# Altium PCB concentrator_pcb.PcbDoc
Units mm, origin at the board's own origin, x right, y up, seen from the top; angles counter-clockwise.
Board outline 85 x 56 mm, 4 copper layers (Top Layer, Int1 (GND), Int2 (PWR), Bottom Layer), stack 1.369 mm thick; 6 components, 0 nets, 202 pads, 0 vias.
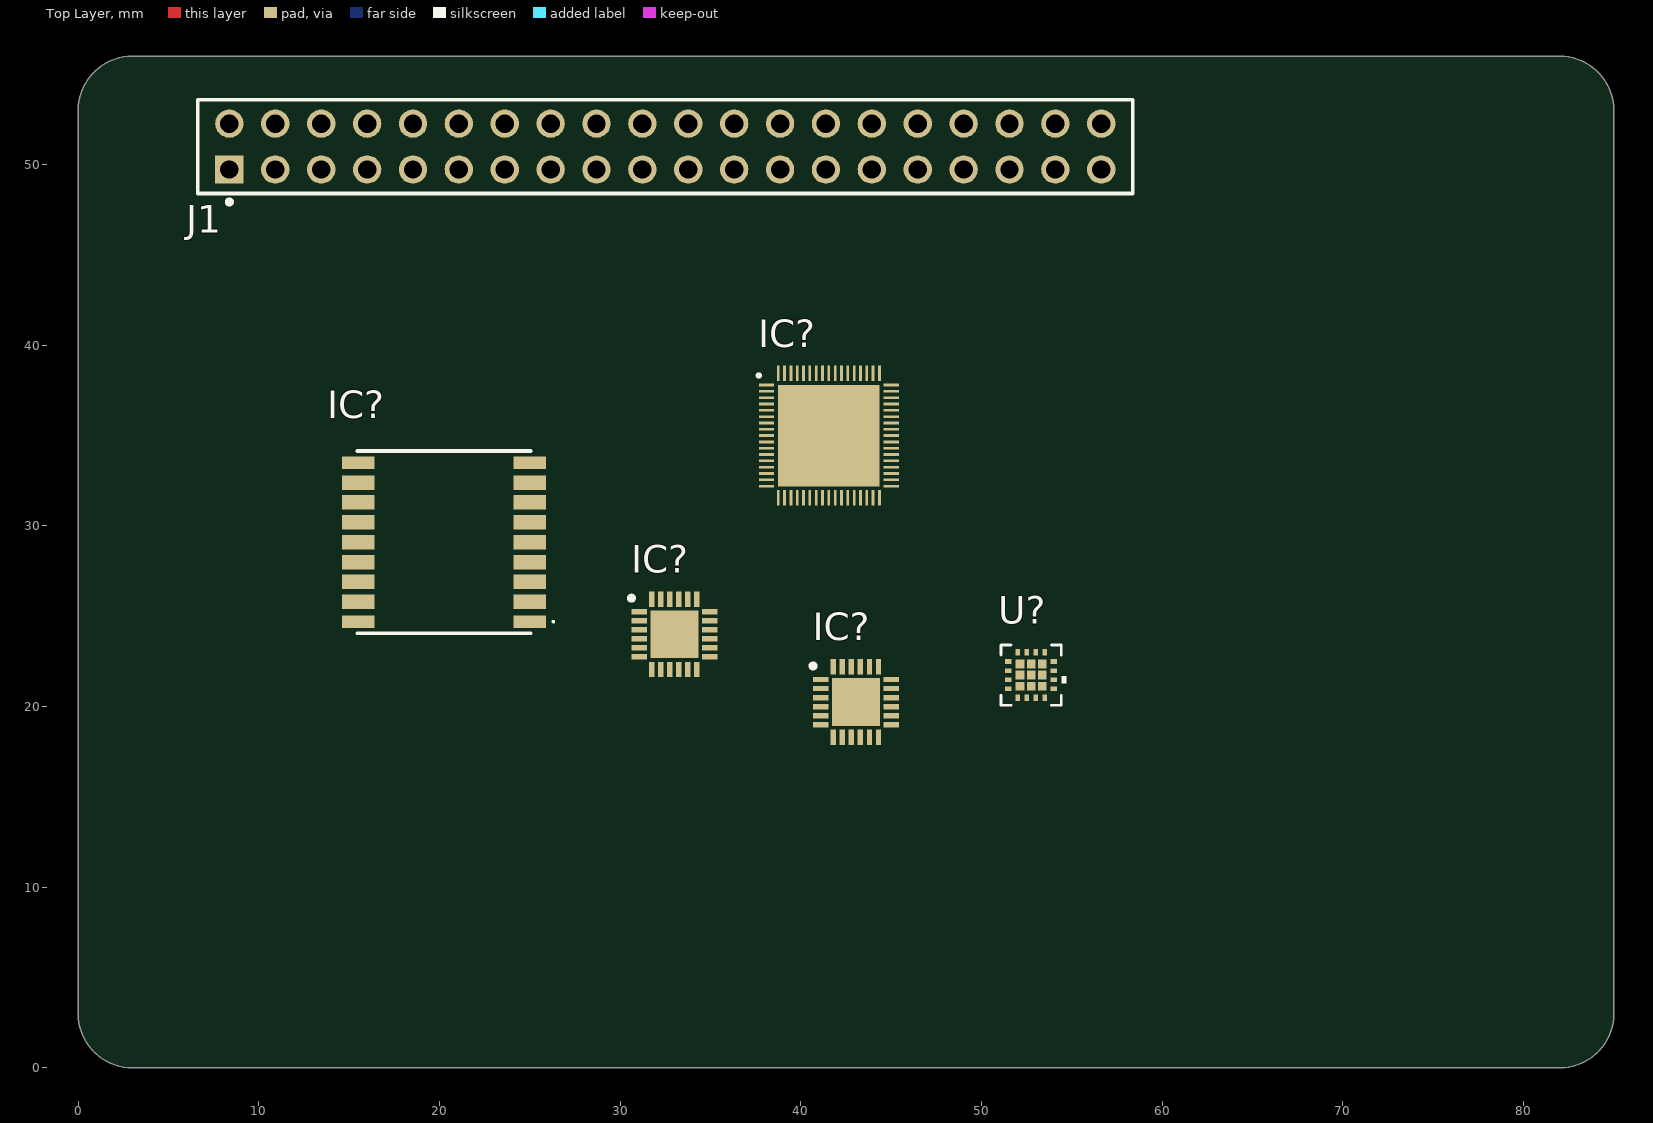
[diagram p0: Top Layer view]
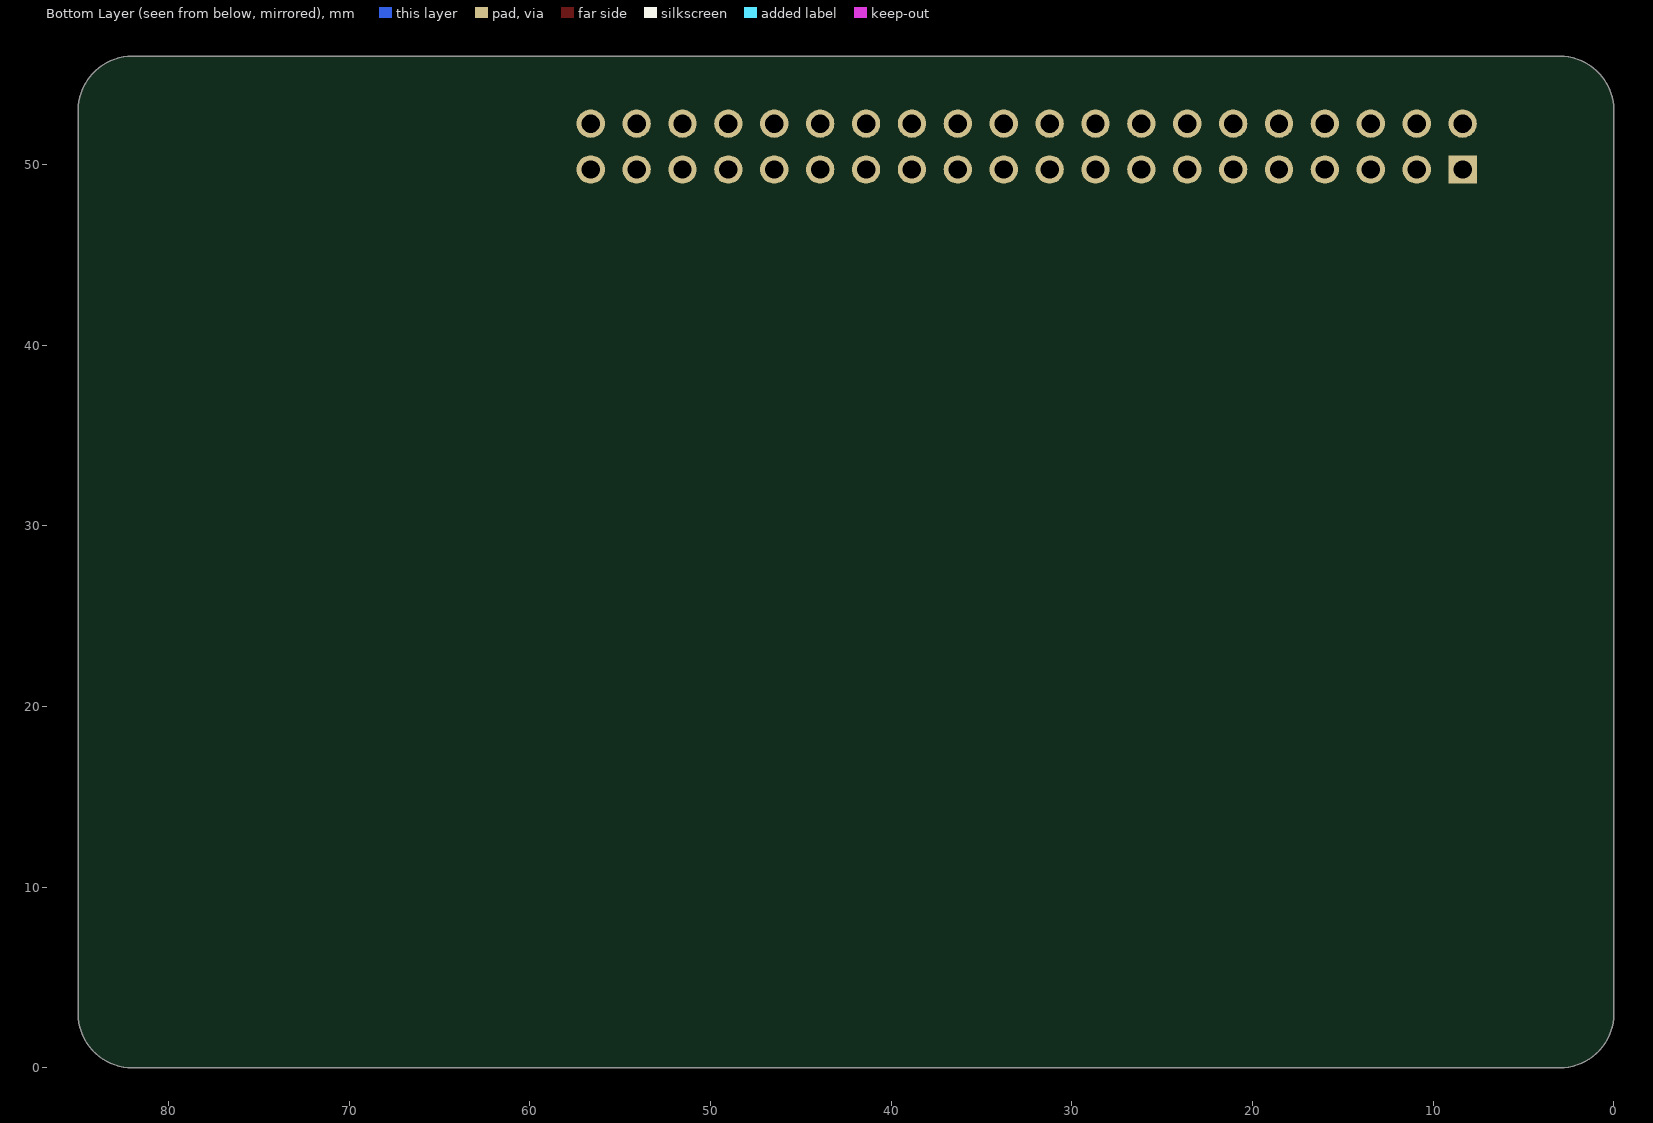
[diagram p1: Bottom Layer view, seen from below]
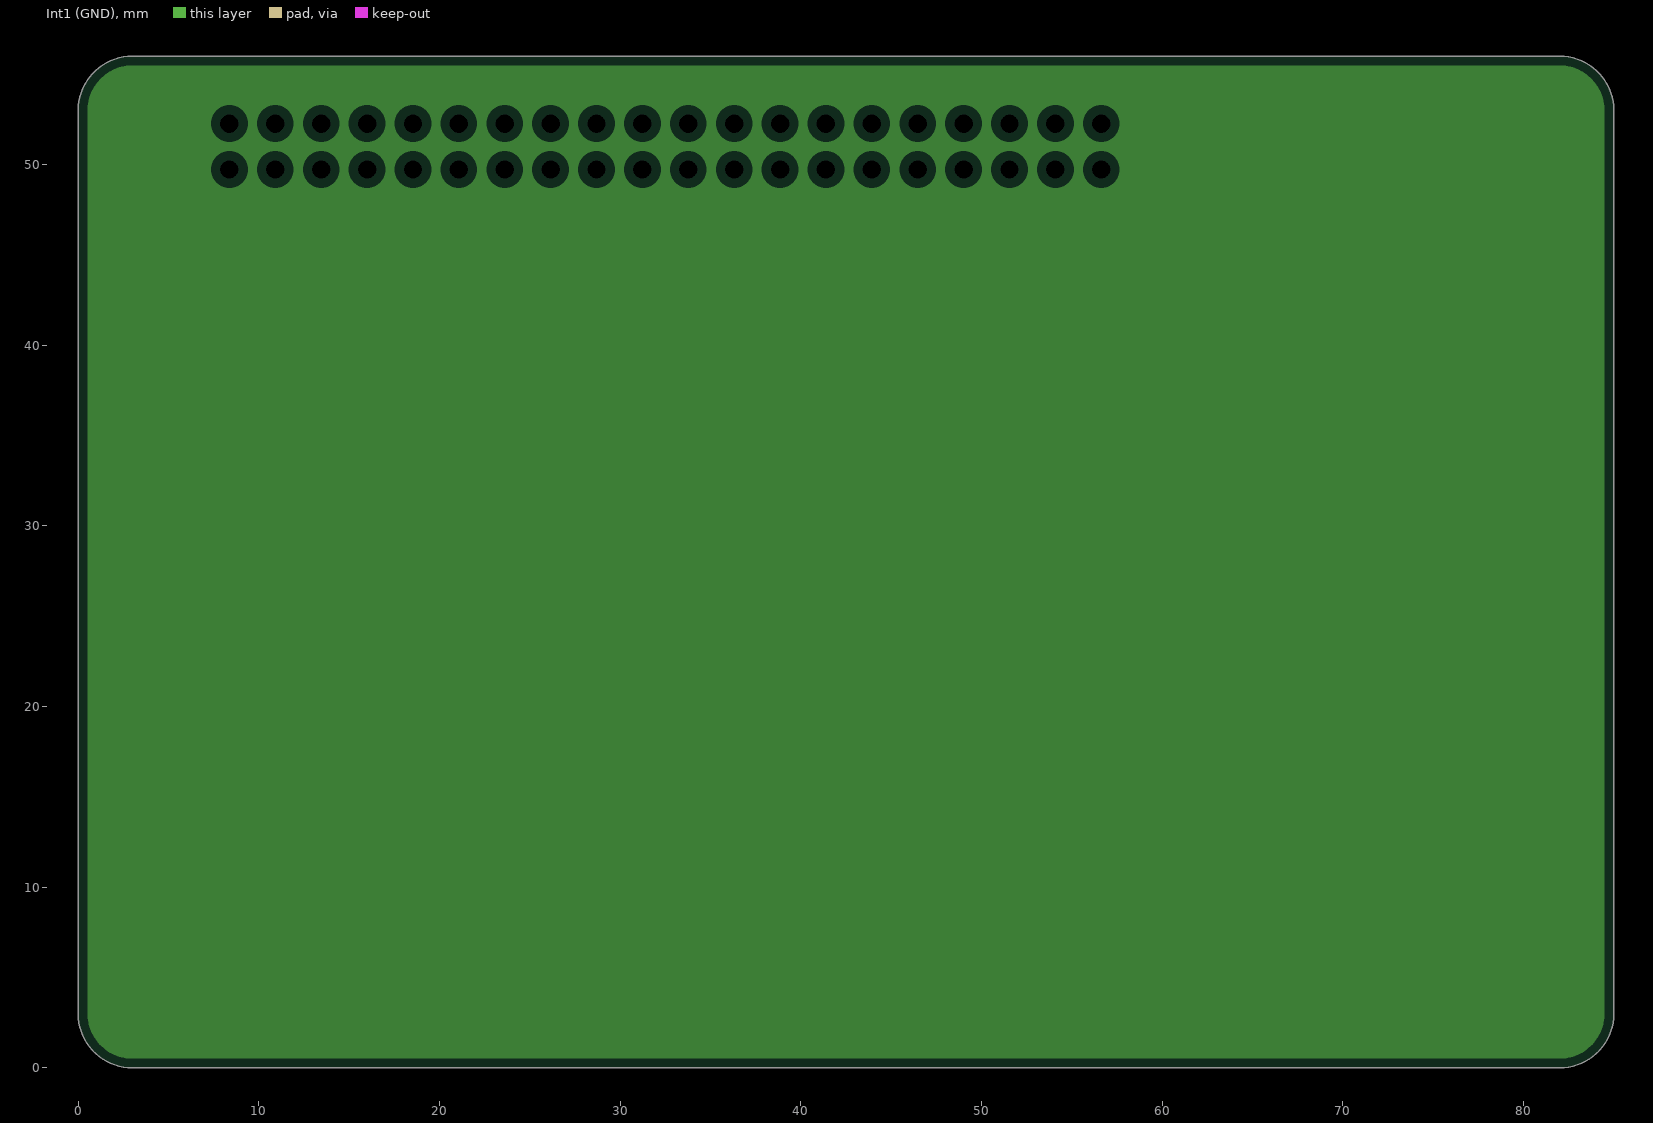
[diagram p2: Int1 (GND), clearances drawn from the general rule]
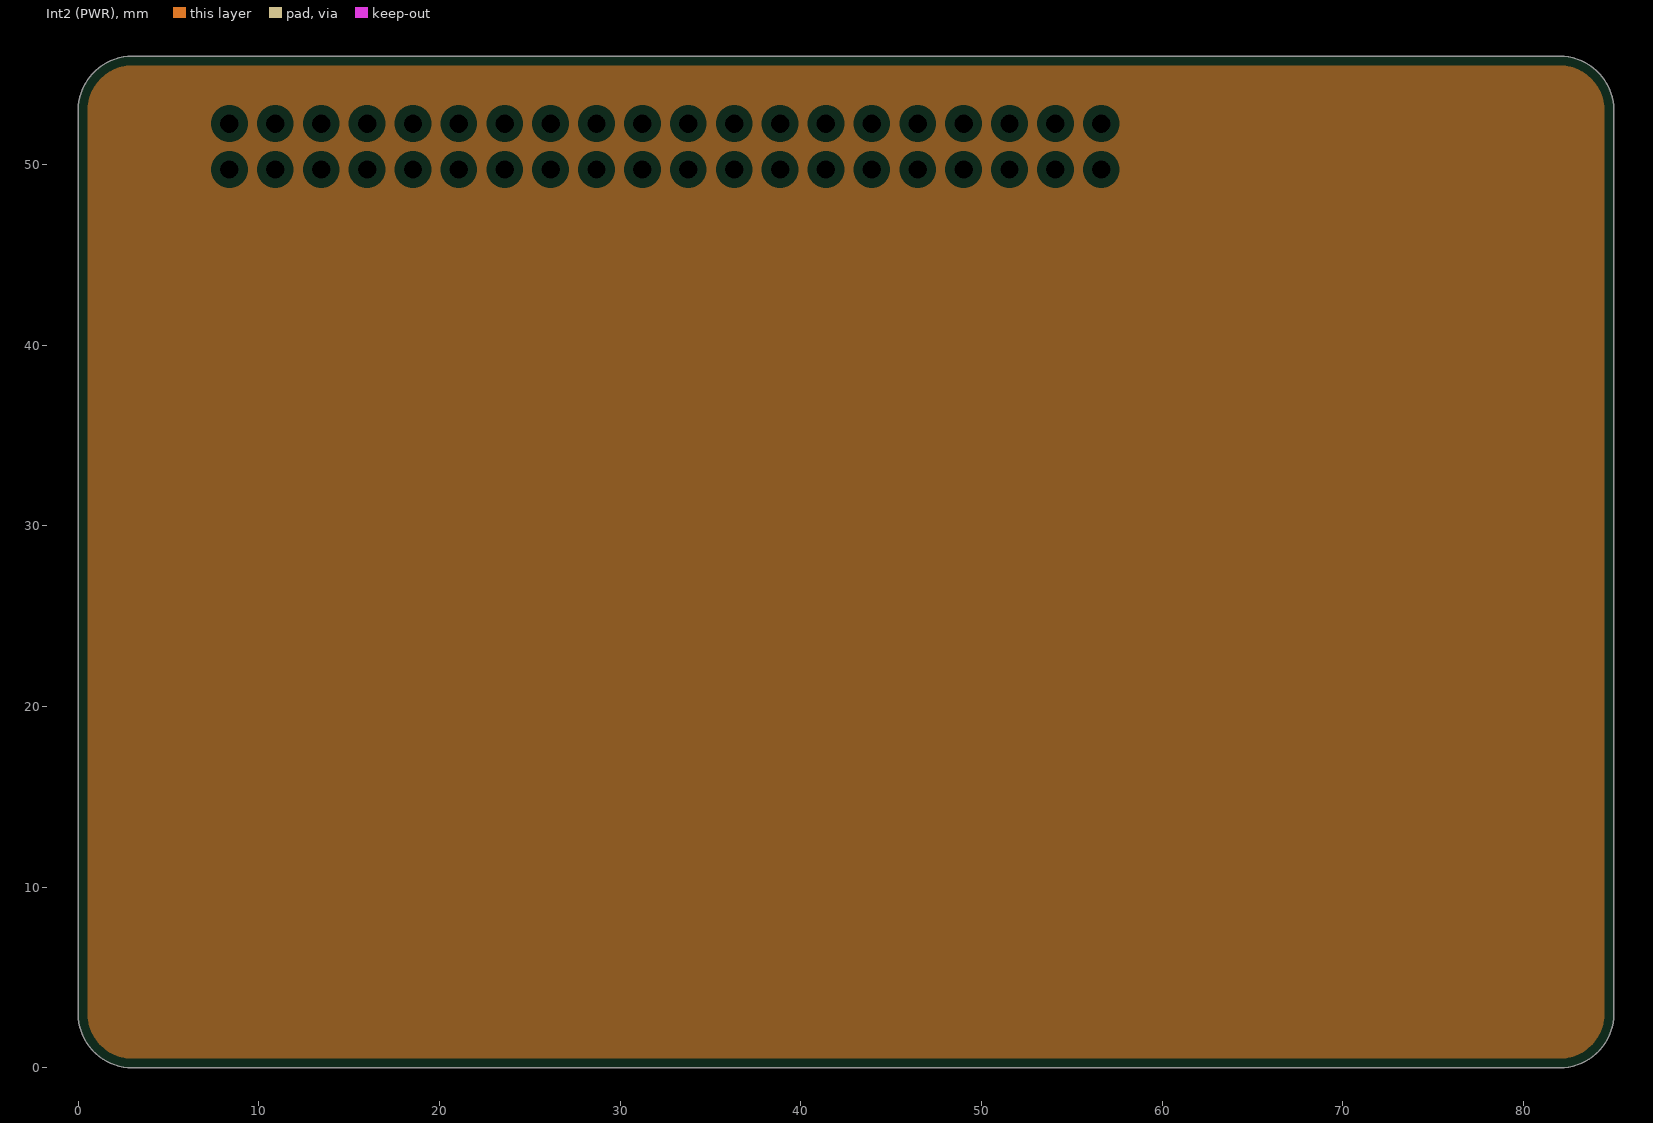
[diagram p3: Int2 (PWR), clearances drawn from the general rule]

## Layer stack, top to bottom
Top Solder: solder mask 0.0254, SM-001, Dk 4
Top Layer: signal copper 0.035
Dielectric 1: prepreg 0.1295, PP-017, Dk 4.3
Dielectric 2: prepreg 0.1295, PP-017, Dk 4.3
Int1 (GND): plane copper 0.035
Dielectric 3: core 0.7112, Core-039, Dk 4.8
Int2 (PWR): plane copper 0.035
Dielectric 4: prepreg 0.1295, PP-017, Dk 4.3
Dielectric 5: prepreg 0.1295, PP-017, Dk 4.3
Bottom Layer: signal copper 0.035
Bottom Solder: solder mask 0.0254, SM-001, Dk 4

## Board outline
0,3 0,53 cw(c3,53) 3,56 82,56 cw(c82,53) 85,53 85,3 cw(c82,3) 82,0 3,0 cw(c3,3)

## Design rules (kind name [scope] priority, off if disabled: settings)
Clearance [All] p1: gap=0.254 ignorepadtopadclearanceinfootprint=FALSE except(0: Arc-Hole Track-Hole SMDPad-Hole THPad-Hole Via-Hole Fill-Hole Poly-Hole Region-Hole Text-Hole)
PlaneClearance [All] p1: clearance=0.508
PlaneConnect [All] p1: planeconnectstyle=Relief reliefexpansion=0.508 reliefentries=4 reliefconductorwidth=0.254 reliefairgap=0.254
PolygonConnect [All] p1: connectstyle=Relief reliefconductorwidth=0.254 reliefentries=4 polygonreliefangle="90 Angle" airgapwidth=0.254
RoutingVias [All] p1: holewidth=0.711 width=1.27 viastyle="Through Hole" minholewidth=0.711 minwidth=1.27 maxholewidth=0.711 maxwidth=1.27
SolderMaskExpansion [All] p1: expansion=0.102 istentingtop=FALSE
Width [All] p1: maxlimit=0.254 minlimit=0.254 preferedwidth=0.254
28 further rules are at their usual default settings.

## Classes and differential pairs
component class sensors: IC?
component class lora-core: IC? U?
component class interfaces: J1

## Components (designator, comment, footprint, x,y, rotation, side; value= is the part's Value field where it differs from the comment)
IC? "MAX-M10S-00B" MAXM10S00B 20.25,29.1 r0 top
IC? "SX1250IMLTRT" QFN50P400X400X100-25N-D 33,24 r0 top
IC? "SX1250IMLTRT" QFN50P400X400X100-25N-D 43.05,20.25 r0 top
IC? "SX1302IMLTRT" QFN35P700X700X80-69N-D 41.55,35 r0 top
J1 "M20-6102045" FP-M20-6102045-MFG 32.5,51 r0 top
U? "SKY66420-11" MCM16_3X3X0P75_SKY 52.75,21.743 r0 top

## Footprints (in the part's own frame and the unit in brackets; to place one, negate y for a bottom-side part, rotate by r counter-clockwise, add the part's x,y. Pads: shape width x height; smd on the part's side, far side on the other; paste and mask are expansions set on the pad)
FP-M20-6102045-MFG [mm]
  rect 1.57x1.57 hole 1.02 paste-1000 mask+0: 1(-24.13,-1.27)
  round 1.57 hole 1.02 paste-1000 mask+0: 2(-24.13,1.27) 3(-21.59,-1.27) 4(-21.59,1.27) 5(-19.05,-1.27) 6(-19.05,1.27) 7(-16.51,-1.27) 8(-16.51,1.27) 9(-13.97,-1.27) 10(-13.97,1.27) 11(-11.43,-1.27) 12(-11.43,1.27) 13(-8.89,-1.27) 14(-8.89,1.27) 15(-6.35,-1.27) 16(-6.35,1.27) 17(-3.81,-1.27) 18(-3.81,1.27) 19(-1.27,-1.27) 20(-1.27,1.27) 21(1.27,-1.27) 22(1.27,1.27) 23(3.81,-1.27) 24(3.81,1.27) 25(6.35,-1.27) 26(6.35,1.27) 27(8.89,-1.27) 28(8.89,1.27) 29(11.43,-1.27) 30(11.43,1.27) 31(13.97,-1.27) 32(13.97,1.27) 33(16.51,-1.27) 34(16.51,1.27) 35(19.05,-1.27) 36(19.05,1.27) 37(21.59,-1.27) 38(21.59,1.27) 39(24.13,-1.27) 40(24.13,1.27)
  silkscreen extent -25.88,-3.19 25.88,2.6, body extent -25.98,-2.7 25.98,2.7, height 0.25
MAXM10S00B [mm]
  rect 1.8x0.7 smd: 1(4.75,-4.4) 9(4.75,4.4) 10(-4.75,4.4) 18(-4.75,-4.4)
  rect 1.8x0.8 smd: 2(4.75,-3.3) 3(4.75,-2.2) 4(4.75,-1.1) 5(4.75,0) 6(4.75,1.1) 7(4.75,2.2) 8(4.75,3.3) 11(-4.75,3.3) 12(-4.75,2.2) 13(-4.75,1.1) 14(-4.75,0) 15(-4.75,-1.1) 16(-4.75,-2.2) 17(-4.75,-3.3)
  silkscreen extent -4.8,-5.05 6.1,5.05, body extent -4.85,-5.05 4.85,5.05, height 2.8
MCM16_3X3X0P75_SKY [mil]
  rect 14x10 smd paste+0 mask+0: 1(-49.5,29.53) 2(-49.5,9.84) 3(-49.5,-9.84) 4(-49.5,-29.53) 9(49.5,-29.53) 10(49.5,-9.84) 11(49.5,9.84) 12(49.5,29.53)
  rect 10x14 smd paste+0 mask+0: 5(-29.53,-49.5) 6(-9.84,-49.5) 7(9.84,-49.5) 8(29.53,-49.5) 13(29.53,49.5) 14(9.84,49.5) 15(-9.84,49.5) 16(-29.53,49.5)
  rect 19x19 smd paste+0 mask+0: 17(-24.21,24.21) 18(0,24.21) 19(24.21,24.21) 20(-24.21,0) 21(0,0) 22(24.21,0) 23(-24.21,-24.21) 24(0,-24.21) 25(24.21,-24.21)
  silkscreen extent -65,-66 76,66, body extent -59,-59 59,59, height 31
QFN35P700X700X80-69N-D [mm]
  rect 0.85x0.15 smd: 1(-3.45,2.8) 2(-3.45,2.45) 3(-3.45,2.1) 4(-3.45,1.75) 5(-3.45,1.4) 6(-3.45,1.05) 7(-3.45,0.7) 8(-3.45,0.35) 9(-3.45,0) 10(-3.45,-0.35) 11(-3.45,-0.7) 12(-3.45,-1.05) 13(-3.45,-1.4) 14(-3.45,-1.75) 15(-3.45,-2.1) 16(-3.45,-2.45) 17(-3.45,-2.8) 35(3.45,-2.8) 36(3.45,-2.45) 37(3.45,-2.1) 38(3.45,-1.75) 39(3.45,-1.4) 40(3.45,-1.05) 41(3.45,-0.7) 42(3.45,-0.35) 43(3.45,0) 44(3.45,0.35) 45(3.45,0.7) 46(3.45,1.05) 47(3.45,1.4) 48(3.45,1.75) 49(3.45,2.1) 50(3.45,2.45) 51(3.45,2.8)
  rect 0.15x0.85 smd: 18(-2.8,-3.45) 19(-2.45,-3.45) 20(-2.1,-3.45) 21(-1.75,-3.45) 22(-1.4,-3.45) 23(-1.05,-3.45) 24(-0.7,-3.45) 25(-0.35,-3.45) 26(0,-3.45) 27(0.35,-3.45) 28(0.7,-3.45) 29(1.05,-3.45) 30(1.4,-3.45) 31(1.75,-3.45) 32(2.1,-3.45) 33(2.45,-3.45) 34(2.8,-3.45) 52(2.8,3.45) 53(2.45,3.45) 54(2.1,3.45) 55(1.75,3.45) 56(1.4,3.45) 57(1.05,3.45) 58(0.7,3.45) 59(0.35,3.45) 60(0,3.45) 61(-0.35,3.45) 62(-0.7,3.45) 63(-1.05,3.45) 64(-1.4,3.45) 65(-1.75,3.45) 66(-2.1,3.45) 67(-2.45,3.45) 68(-2.8,3.45)
  rect 5.61x5.61 smd: 69(0,0)
  silkscreen extent -3.96,3.24 -3.79,3.41, body extent -3.55,-3.55 3.55,3.55, height 0.8
QFN50P400X400X100-25N-D [mm]
  rect 0.85x0.3 smd: 1(-1.95,1.25) 2(-1.95,0.75) 3(-1.95,0.25) 4(-1.95,-0.25) 5(-1.95,-0.75) 6(-1.95,-1.25) 13(1.95,-1.25) 14(1.95,-0.75) 15(1.95,-0.25) 16(1.95,0.25) 17(1.95,0.75) 18(1.95,1.25)
  rect 0.3x0.85 smd: 7(-1.25,-1.95) 8(-0.75,-1.95) 9(-0.25,-1.95) 10(0.25,-1.95) 11(0.75,-1.95) 12(1.25,-1.95) 19(1.25,1.95) 20(0.75,1.95) 21(0.25,1.95) 22(-0.25,1.95) 23(-0.75,1.95) 24(-1.25,1.95)
  rect 2.65x2.65 smd: 25(0,0)
  silkscreen extent -2.5,1.88 -2.25,2.12, body extent -2.05,-2.05 2.05,2.05, height 1

## Part data
IC?: "Integrated Circuit", Manufacturer_Name=U-Blox, Mouser Part Number=377-MAX-M10S-00B, Datasheet Link=https://content.u-blox.com/sites/default/files/MAX-M10S_IntegrationManual_UBX-20053088.pdf, Height=2.7mm, Manufacturer_Part_Number=MAX-M10S-00B, Mouser Price/Stock=https://www.mouser.co.uk/ProductDetail/u-blox/MAX-M10S-00B?qs=A6eO%252BMLsxmT0PfQYPb7LLQ%3D%3D
IC? IC?: "Integrated Circuit", Manufacturer_Name=SEMTECH, Mouser Part Number=947-SX1250IMLTRT, Arrow Part Number=SX1250IMLTRT, Arrow Price/Stock=https://www.arrow.com/en/products/sx1250imltrt/semtech?region=nac, Datasheet Link=https://componentsearchengine.com/Datasheets/1/SX1250IMLTRT.pdf, Height=1mm, Manufacturer_Part_Number=SX1250IMLTRT, Mouser Price/Stock=https://www.mouser.co.uk/ProductDetail/Semtech/SX1250IMLTRT?qs=bZr6mbWTK5l3tz86ZAy1ig%3D%3D
IC?: "Integrated Circuit", Manufacturer_Name=SEMTECH, Mouser Part Number=947-SX1302IMLTRT, Datasheet Link=https://datasheet.datasheetarchive.com/originals/distributors/Datasheets_SAMA/c18cc298abe30af156b2783e16147acc.pdf, Height=0.8mm, Manufacturer_Part_Number=SX1302IMLTRT, Mouser Price/Stock=https://www.mouser.co.uk/ProductDetail/Semtech/SX1302IMLTRT?qs=bZr6mbWTK5nALa%252B96PTK0Q%3D%3D
J1: library part CMP-15831-000080-1, "CONN STKTHRU PC/104 40POS PCB", Color=Black, Contact Resistance=30mR, Current Rating=3A, Flammability Rating="UL94 V-0", Insulation Resistance=5GR, Max Operating Temperature=105°C, Min Operating Temperature=-55°C, Package Quantity=11, Contact Material=Bronze, Contact Plating=Gold, Depth=5.25mm, Gender=Receptacle, Housing Color=Black, Housing Material=Nylon, Length=51.46mm, Material=Nylon, Max Current Rating=3A, Mount="Through Hole", Number of Contacts=40, Number of Positions=40, Number of Rows=2, Orientation=Straight, Packaging=Rail/Tube, Pitch=2.54mm, Radiation Hardening=No, REACH SVHC="No SVHC", Series=M20, Termination=Solder, Weight=0.218205oz
U?: library part CMP-005-000000-1, "Built for UNReLo. 860 to 930 MHz RF Front-End Module", Mfr_Name=Skyworks, Component Type=Standard, Copyright="Copyright (C) 2022 Ultra Librarian. All rights reserved.", Design Item ID=SKY66420-11, Digi-Key_Part_Number_1=863-2028-2-ND, Digi-Key_Part_Number_2=863-2028-1-ND, Digi-Key_Part_Number_3=863-2028-6-ND, Manufacturer_Part_Number=SKY66420-11, Pin Count=25, RefDes=RefDes, Source=SKY66420-11.SchLib, Type=DEV

## Nets (pads, with @x,y where several pads share a name; then routed paths per layer and width w, separated by ;. In a path a pad name is that pad's centre, name@x,y a point inside that pad or via, vN(x,y) a via of type N, cw(c..) or ccw(c..) an arc to the next point about the centre after c; other vN are vias at no path point)
pads on no net: IC?.1 IC?.2 IC?.3 IC?.4 IC?.5 IC?.6 IC?.7 IC?.8 IC?.9 IC?.10 IC?.11 IC?.12 IC?.13 IC?.14 IC?.15 IC?.16 IC?.17 IC?.18 IC?.19 IC?.20 IC?.21 IC?.22 IC?.23 IC?.24 IC?.25 IC?.26 IC?.27 IC?.28 IC?.29 IC?.30 IC?.31 IC?.32 IC?.33 IC?.34 IC?.35 IC?.36 IC?.37 IC?.38 IC?.39 IC?.40 IC?.41 IC?.42 IC?.43 IC?.44 IC?.45 IC?.46 IC?.47 IC?.48 IC?.49 IC?.50 IC?.51 IC?.52 IC?.53 IC?.54 IC?.55 IC?.56 IC?.57 IC?.58 IC?.59 IC?.60 IC?.61 IC?.62 IC?.63 IC?.64 IC?.65 IC?.66 IC?.67 IC?.68 IC?.69 J1.1 J1.2 J1.3 J1.4 J1.5 J1.6 J1.7 J1.8 J1.9 J1.10 J1.11 J1.12 J1.13 J1.14 J1.15 J1.16 J1.17 J1.18 J1.19 J1.20 J1.21 J1.22 J1.23 J1.24 J1.25 J1.26 J1.27 J1.28 J1.29 J1.30 J1.31 J1.32 J1.33 J1.34 J1.35 J1.36 J1.37 J1.38 J1.39 J1.40 U?.1 U?.2 U?.3 U?.4 U?.5 U?.6 U?.7 U?.8 U?.9 U?.10 U?.11 U?.12 U?.13 U?.14 U?.15 U?.16 U?.17 U?.18 U?.19 U?.20 U?.21 U?.22 U?.23 U?.24 U?.25

## Polygon pours and split planes (outlines as drawn)
no net on Int1 (GND) (split plane): 82.217,55.482 82.433,55.454 82.645,55.407 82.852,55.342 83.053,55.258 83.246,55.158 83.429,55.041 83.602,54.909 83.762,54.762 83.909,54.602 84.041,54.429 84.158,54.246 84.258,54.053 84.342,53.852 84.407,53.645 84.454,53.433 84.482,53.217 84.491,53.016 84.49,53 84.49,3 84.491,2.984 84.482,2.783 84.454,2.567 84.407,2.355 84.342,2.148 84.258,1.947 84.158,1.754 84.041,1.571 83.909,1.398 83.762,1.238 83.602,1.091 83.429,0.959 83.246,0.842 83.053,0.742 82.852,0.658 82.645,0.593 82.433,0.546 82.217,0.518 82.016,0.509 82,0.51 3,0.51 2.984,0.509 2.783,0.518 2.567,0.546 2.355,0.593 2.148,0.658 1.947,0.742 1.754,0.842 1.571,0.959 1.398,1.091 1.238,1.238 1.091,1.398 0.959,1.571 0.842,1.754 0.742,1.947 0.658,2.148 0.593,2.355 0.546,2.567 0.518,2.783 0.509,2.984 0.51,3 0.51,53 0.509,53.016 0.518,53.217 0.546,53.433 0.593,53.645 0.658,53.852 0.742,54.053 0.842,54.246 0.959,54.429 1.091,54.602 1.238,54.762 1.398,54.909 1.571,55.041 1.754,55.158 1.947,55.258 2.148,55.342 2.355,55.407 2.567,55.454 2.783,55.482 2.984,55.491 3,55.49 82,55.49 82.016,55.491
no net on Int2 (PWR) (split plane): 82.217,55.482 82.433,55.454 82.645,55.407 82.852,55.342 83.053,55.258 83.246,55.158 83.429,55.041 83.602,54.909 83.762,54.762 83.909,54.602 84.041,54.429 84.158,54.246 84.258,54.053 84.342,53.852 84.407,53.645 84.454,53.433 84.482,53.217 84.491,53.016 84.49,53 84.49,3 84.491,2.984 84.482,2.783 84.454,2.567 84.407,2.355 84.342,2.148 84.258,1.947 84.158,1.754 84.041,1.571 83.909,1.398 83.762,1.238 83.602,1.091 83.429,0.959 83.246,0.842 83.053,0.742 82.852,0.658 82.645,0.593 82.433,0.546 82.217,0.518 82.016,0.509 82,0.51 3,0.51 2.984,0.509 2.783,0.518 2.567,0.546 2.355,0.593 2.148,0.658 1.947,0.742 1.754,0.842 1.571,0.959 1.398,1.091 1.238,1.238 1.091,1.398 0.959,1.571 0.842,1.754 0.742,1.947 0.658,2.148 0.593,2.355 0.546,2.567 0.518,2.783 0.509,2.984 0.51,3 0.51,53 0.509,53.016 0.518,53.217 0.546,53.433 0.593,53.645 0.658,53.852 0.742,54.053 0.842,54.246 0.959,54.429 1.091,54.602 1.238,54.762 1.398,54.909 1.571,55.041 1.754,55.158 1.947,55.258 2.148,55.342 2.355,55.407 2.567,55.454 2.783,55.482 2.984,55.491 3,55.49 82,55.49 82.016,55.491

## Silkscreen, mask and mechanical layers (free items; w line width, h text height)
Mechanical 1:
  the board outline again, w0.254

## Text inside footprints (layer, text, board x,y; h text height)
U?: Mechanical 13 "*" at 51.988,21.858 h1.27